# EAGLE board DAU_Kupplung.brd_V1_0 (EAGLE 5.11)

Size 100 x 80 mm. Coordinates in mm from the lower left corner, seen from the top.
Outline: 0,0 100,0 100,80 0,80 0,0
Copper layers (1*16): Top 0.035mm / dielectric 1.5mm / Bottom 0.035mm
Design rules "default": minimum track width 10mil, minimum drill 24mil, track to track 8mil, track to pad 8mil, pad to pad 8mil, via to via 8mil, smd to smd 8mil, copper to edge 40mil, drill to drill 8mil, minimum pad ring 10mil, minimum via ring 8mil, stop-mask expansion 4mil, vias tented up to drill 0mil, thermal gap 10mil

## Footprints (pad centres in the part's own frame; a part is rotated, then mirrored left to right if it is on the bottom)
C2.5-3 = drill 0.813 pad 1.6 octagon: 1 -1.27,0; 2 1.27,0
C225-087X268 = drill 1.016 octagon: 1 -11.303,0; 2 11.303,0
C025-040X050 = drill 0.813 octagon: 1 -1.27,0; 2 1.27,0
E2,5-6 = drill 0.813 pad 1.6 round: + -1.27,0 | drill 0.813 pad 1.6 octagon: - 1.27,0
E2,5-6E = drill 0.813 pad 1.575 round: + -1.27,0 | drill 0.813 pad 1.575 octagon: - 1.27,0
0204/7 = drill 0.813 octagon: 1 -3.81,0; 2 3.81,0
P1-17Y = drill 1.702 pad 2.121 long: TP 0,0
RAC04_12SA = drill 0.9 octagon: +VO 25.4,24.13; GND 28.575,24.13; L 31.75,3.175; N 25.4,3.175; NC 3.81,3.175; NC1 31.75,24.13
TRAFO_0,35VA = drill 0.9 octagon: L 3.81,17.78; N 3.81,3.81; OUT1 18.415,13.335; OUT2 18.415,8.255
ADUC_MINIMUM = drill 0.9 long: ADC0 -9.207,-16.51; ADC1 -6.668,-16.51; ADC2 -4.128,-16.51; ADC3 -1.587,-16.51; ADC4 6.032,-16.51; ADC5 8.572,-16.51; ADC6 13.652,-16.51; ADC7 13.652,-13.97; ALE -14.287,6.35; DAC0 0.953,-16.51; DAC1 3.493,-16.51; GND 3.493,16.51; GND2 -4.128,16.51; GND3 -6.668,16.51; INT0 13.652,-6.35; MISO 13.652,-3.81; MOSI 13.652,11.43; P00 -14.287,3.81; P01 -14.287,1.27; P02 -14.287,-1.27; P03 -14.287,-3.81; P04 -14.287,-6.35; P05 -14.287,-8.89; P06 -14.287,-11.43; P07 -14.287,-13.97; P20 13.652,13.97; P21 13.652,16.51; P22 8.572,16.51; P23 6.032,16.51; P24 -9.207,16.51; P25 -14.287,13.97; P34 13.652,-1.27; P35 13.652,1.27; P36 13.652,3.81; P37 13.652,6.35; PWM0 -14.287,11.43; PWM1 -14.287,8.89; RXD 13.652,-11.43; SCLOCK 13.652,8.89; TXD 13.652,-8.89; VCC 0.953,16.51; VCC1 -1.587,16.51
MODEM_FUSS = drill 0.7 pad 0.813 long: P$1 -20.32,-8.89; P$2 -19.05,-8.89; P$3 -17.78,-8.89; P$4 -16.51,-8.89; P$5 -15.24,-8.89; P$6 -13.97,-8.89; P$7 -12.7,-8.89; P$8 -11.43,-8.89; P$9 -10.16,-8.89; P$10 -8.89,-8.89; P$11 -7.62,-8.89; P$12 -6.35,-8.89; P$13 -5.08,-8.89; P$14 -3.81,-8.89; P$15 -2.54,-8.89; P$16 -1.27,-8.89; P$17 0,-8.89; P$18 1.27,-8.89; P$19 2.54,-8.89; P$20 3.81,-8.89; P$21 5.08,-8.89; P$22 6.35,-8.89; P$23 7.62,-8.89; P$24 8.89,-8.89; P$25 10.16,-8.89; P$29 -20.32,-3.937; P$30 -20.32,-5.207; P$31 -20.32,-6.477 | drill 0.7 pad 0.61 long: P$26 -20.32,-0.127; P$27 -20.32,-1.397; P$28 -20.32,-2.667
PLC-UEBERTRAGER_V2 = smd 2.54 x 1.27: 1LINE1 6.35,3.81; 2 6.35,1.27; 3 6.35,-1.27; 4LINE2 6.35,-3.81; 6NC -6.35,1.27; 7NC -6.35,-1.27; 8N -6.35,-3.81; L5 -6.35,3.81
AC1010 = drill 0.9 octagon: P$1 20.32,8.89; P$2 5.08,8.89; P$3 12.7,1.27
TO100_10PIN = drill 0.7 octagon: 1 0,-5.842; 2 -3.429,-4.826; 3 -5.588,-1.778; 4 -5.461,2.032; 5 -3.302,4.826; 6 0,5.842; 7 3.556,4.572; 8 5.588,1.778; 9 5.588,-1.778; 10 3.429,-4.699
RECTIFIER = drill 0.8 square: + 6.858,7.62; - 1.524,7.62; ~1 1.524,0; ~2 6.858,0
DIODE15_5MM = drill 0.8 pad 1.422 octagon: P$1 0,0; P$2 15.24,0
LM7805 = drill 1.016 long: GND 7.62,-3.81; IN 5.08,-3.81; OUT 10.16,-3.81 | hole 3.302: 7.62,12.446
TS1084 = drill 1.016 long: 1GND 5.08,1.27; 2OUT 7.62,1.27; 3IN 10.16,1.27 | hole 3.302: 7.62,17.526

## Placement (x,y rotation side)
C1  [C2.5-3]  87.63,50.8 270 top
C2  [C225-087X268]  16.51,60.96 0 top
C3  [C025-040X050]  88.9,39.37 0 top
C4  [C025-040X050]  66.04,40.64 0 top
C5  [C025-040X050]  82.55,54.61 0 top
C6  [E2,5-6]  85.09,44.45 0 top
C7  [E2,5-6]  57.15,48.26 0 top
C8  [E2,5-6]  96.52,41.91 0 top
C9  [C025-040X050]  76.2,53.34 0 top
C10  [E2,5-6E]  66.04,53.34 0 top
R1  [0204/7]  92.71,53.34 90 top
R2  [0204/7]  95.25,53.34 270 top
R3  [0204/7]  12.7,44.45 180 top
R4  [0204/7]  8.89,72.39 270 top
TP1  PTR1PAD1-17Y  [P1-17Y]  3.81,50.8 0 top
TP2  PTR1PAD1-17Y  [P1-17Y]  62.23,33.02 0 top
TP3  PTR1PAD1-17Y  [P1-17Y]  10.16,50.8 0 top
TP4  PTR1PAD1-17Y  [P1-17Y]  16.51,50.8 0 top
U$1  RECOM_RAC04_12SA  [RAC04_12SA]  29.21,1.27 0 top
U$2  SICHERHEITSTRAFO  [TRAFO_0,35VA]  2.54,2.54 0 top
U$3  ADUC831_MINIMUM  [ADUC_MINIMUM]  82.55,19.05 180 top
U$4  MODEMSTECKER  [MODEM_FUSS]  77.47,67.31 180 top
U$5  PLC_UEBERTRAGER_V2  [PLC-UEBERTRAGER_V2]  21.59,72.39 0 top
U$6  AC1010  [AC1010]  2.54,29.21 0 top
U$7  AD636  [TO100_10PIN]  43.18,38.1 0 top
U$8  RECTIFIER  [RECTIFIER]  72.39,41.91 0 top
U$9  SUPPRESSORDIODE15MM  [DIODE15_5MM]  2.54,60.96 90 top
U$10  LM7805  [LM7805]  49.53,49.53 90 top
U$11  TS1084  [TS1084]  54.61,64.77 90 top

## Library data of the parts
C1 = capacitor-wima
C2-C8 R1-R4 = resistor
C9 C10 = rcl
TP1-TP4 = testpad
U$1 U$2 U$4 U$6-U$10 = ADS
U$3 = ADS_ADUCBoards
U$5 U$11 = ADS1

## Nets
+3V3: C5.1 C8.+ U$4.P$4 U$4.P$5 U$11.2OUT
+5V: C4.1 C7.+ C9.2 C10.+ U$3.VCC U$4.P$25 U$10.OUT U$11.3IN
+12V: C3.1 C6.+ U$1.+VO U$10.IN
GND: C1.1 C3.2 C4.2 C5.2 C6.- C7.- C8.- R2.1 U$1.GND U$4.P$2 U$4.P$3 U$8.- U$10.GND U$11.1GND
N$1: C9.1 U$3.GND
N$2: R4.1 U$5.8N U$9.P$2
N$3: U$2.OUT1 U$8.~1
N$4: U$2.OUT2 U$8.~2
N$6: C1.2 R1.1 R2.2 U$3.ADC0
N$7: R1.2 U$8.+
N$8: R3.1 U$6.P$1
N$9: R3.2 U$6.P$2
N$10: TP2.TP TP4.TP U$1.N U$2.N
N$11: C2.1 U$5.L5 U$9.P$1
N$12: C2.2 R4.2 TP1.TP U$1.L U$2.L

## Tracks (layer width: path | path; a pad name or v marks a point on that pad's centre or on a via)
+3V3  (4 unrouted)
+5V  (7 unrouted)
+12V  (3 unrouted)
GND  (13 unrouted)
N$1  (1 unrouted)
N$2  (2 unrouted)
N$3  (1 unrouted)
N$4  (1 unrouted)
N$6  (3 unrouted)
N$7  (1 unrouted)
N$8  (1 unrouted)
N$9  (1 unrouted)
N$10  (3 unrouted)
N$11  (2 unrouted)
N$12  (4 unrouted)